# Altium PCB MachESP8266.PcbDoc
Units mm, origin at the board's own origin, x right, y up, seen from the top; angles counter-clockwise.
Board outline 120.15 x 80.17 mm, 2 copper layers (Top Layer, Bottom Layer); 23 components, 19 nets, 86 pads, 0 vias.
Unrouted connection lines stored in the file: 1.
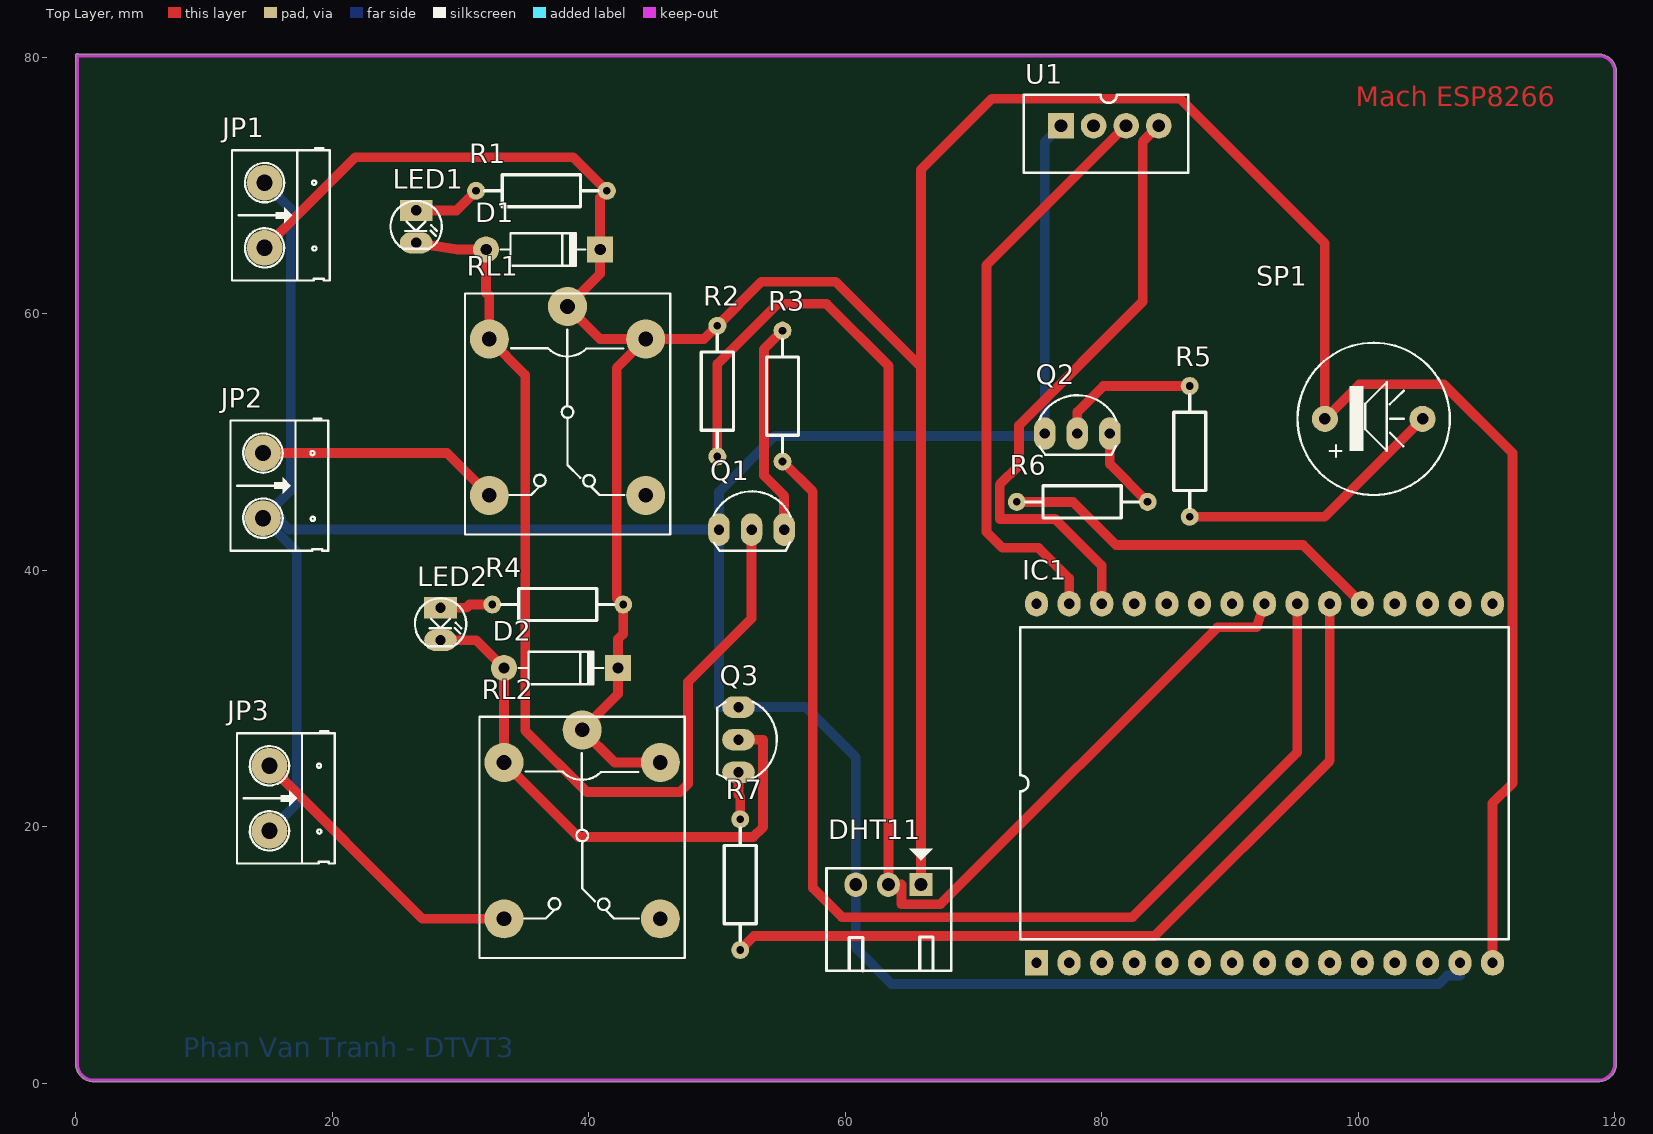
[diagram p0: Top Layer view]
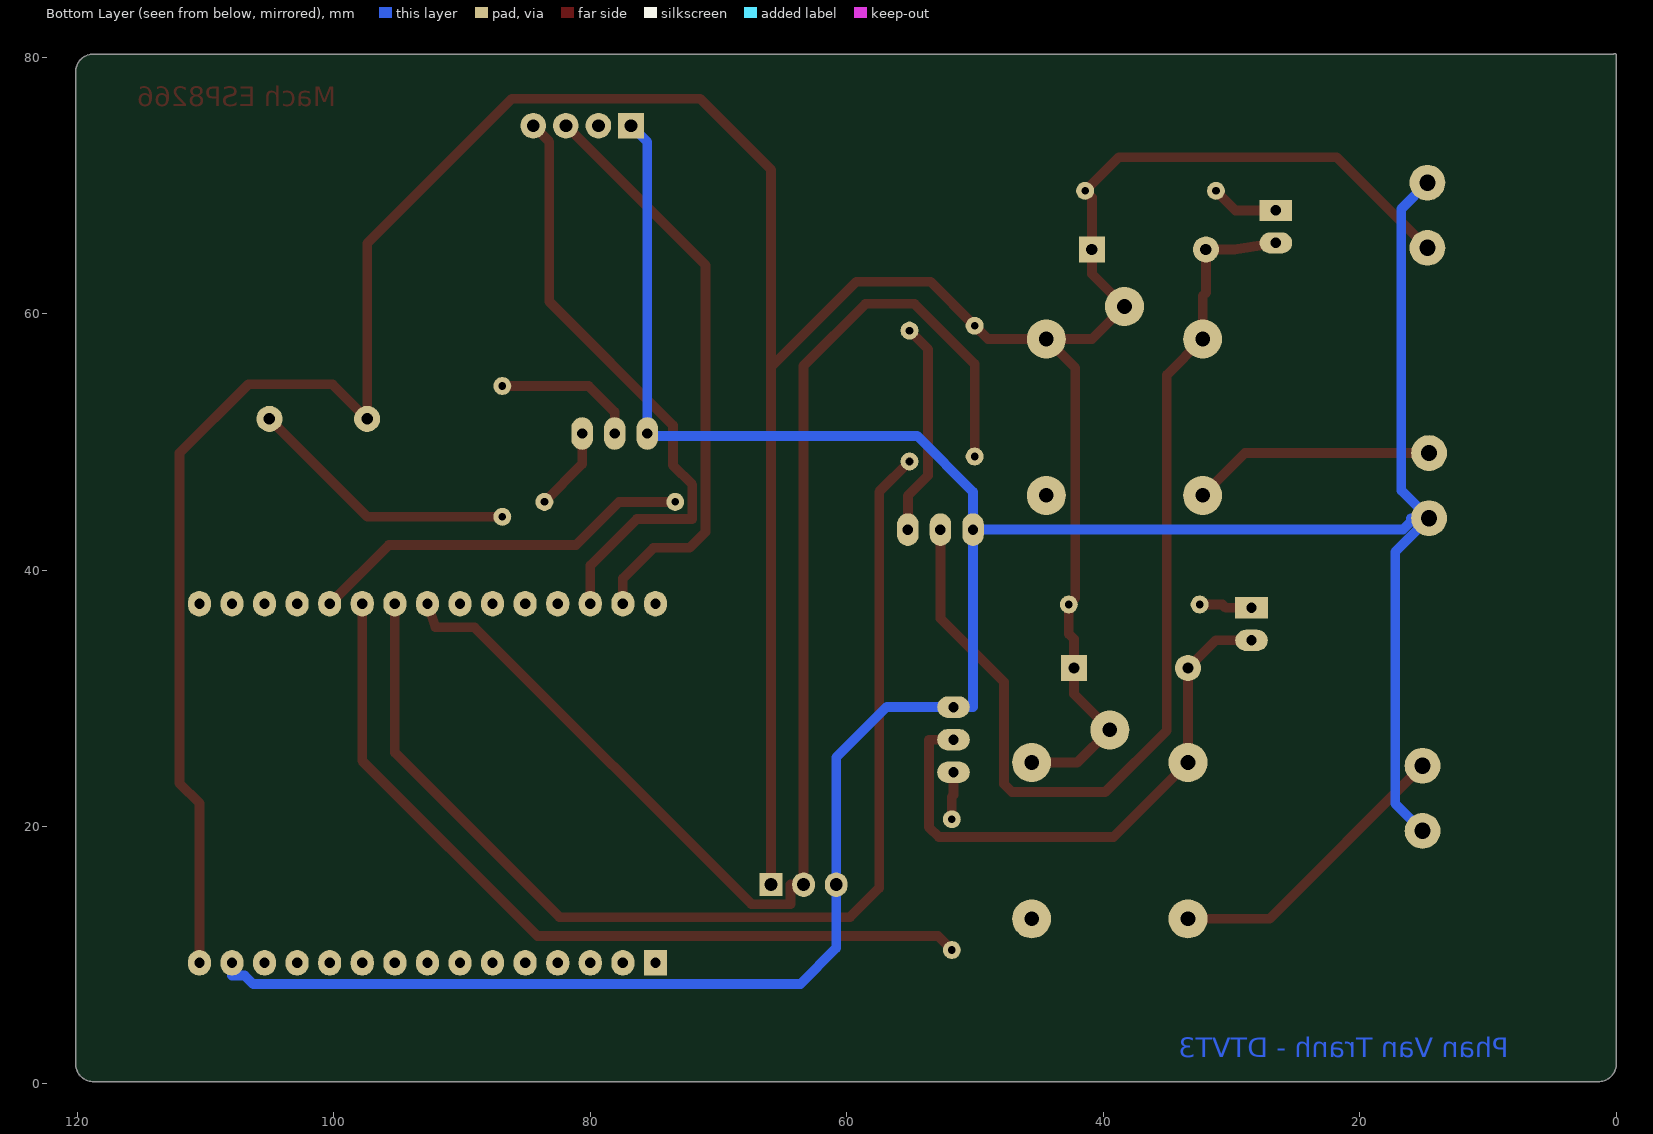
[diagram p1: Bottom Layer view, seen from below]
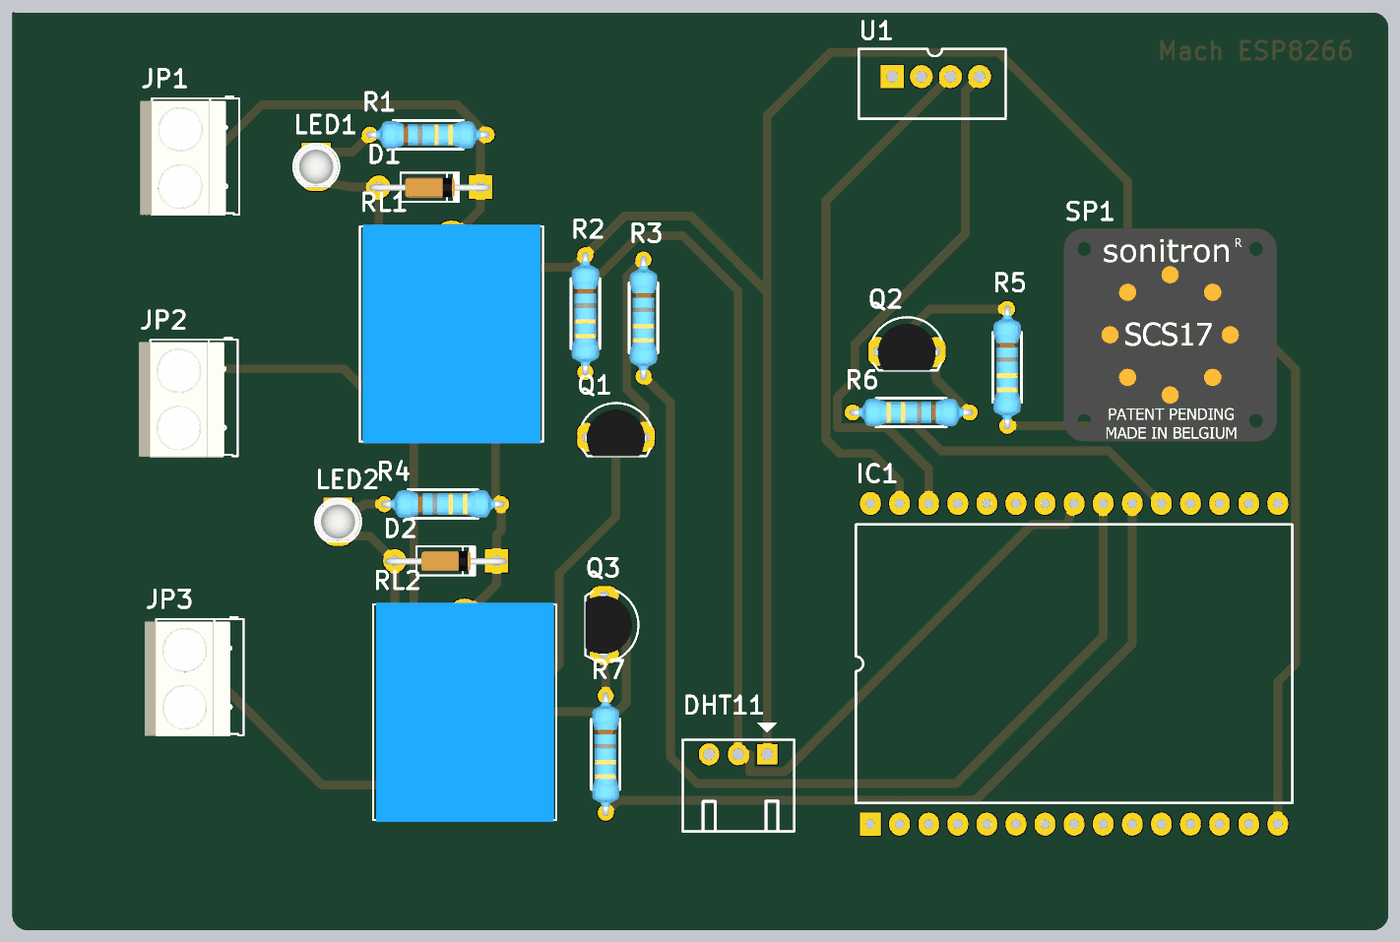
[diagram p2: 3D render of the assembled board from above, using the file's embedded part models]

## Layer stack, top to bottom
Top Solder: solder mask 0.0102, Solder Resist, Dk 3.5
Top Layer: signal copper 0.0356
Dielectric 1: dielectric 0.32, FR-4, Dk 4.8
Bottom Layer: signal copper 0.0356
Bottom Solder: solder mask 0.0102, Solder Resist, Dk 3.5

## Board outline
0,1.524 0,80.137 cw(c0.123,80.168) 0.206,80.264 118.745,80.264 cw(c118.745,78.867) 120.142,78.867 120.142,1.524 cw(c118.745,1.524) 118.745,0.127 1.397,0.127 cw(c1.397,1.524)

## Design rules (kind name [scope] priority, off if disabled: settings)
Clearance [All] p1: gap=0.254 ignorepadtopadclearanceinfootprint=FALSE
PolygonConnect [All] p1: connectstyle=Relief reliefconductorwidth=0.254 reliefentries=4 polygonreliefangle="90 Angle" airgapwidth=0.254
RoutingLayers RoutingLayers_GND [InNet('GND')] p1: top layer_v5=FALSE bottom layer_v5=TRUE
RoutingLayers [All] p2: top layer_v5=TRUE bottom layer_v5=FALSE
RoutingVias [All] p1: holewidth=0.711 width=1.27 viastyle="Through Hole" minholewidth=0.711 minwidth=1.27 maxholewidth=0.711 maxwidth=1.27
SolderMaskExpansion [All] p1: expansion=0.102 istentingtop=FALSE
SupplyNets "Schematic Supply Nets_2" [InNet('VCC')] p1: voltage=0.000
SupplyNets "Schematic Supply Nets" [InNet('GND')] p2: voltage=0.000
Width Width_GND [InNet('GND')] p1: maxlimit=0.762 minlimit=0.762 preferedwidth=0.762
Width [All] p2: maxlimit=0.762 minlimit=0.762 preferedwidth=0.762
29 further rules are at their usual default settings.

## Components (designator, comment, footprint, x,y, rotation, side; value= is the part's Value field where it differs from the comment)
D1 "1N4007" D1A 32.004,65.024 r180 top
D2 "1N4007" D1A 33.401,32.385 r180 top
DHT11 "JP3" "Header 3P DC 2.54" 65.913,15.494 r270 top
IC1 "ESP8266" "ESP8266 - duplicate" 74.93,9.398 r90 top
JP1 "Header 2_1" HED2 14.732,70.231 r270 top value="Header 2"
JP2 "Header 2_1" HED2 14.605,49.149 r270 top value="Header 2"
JP3 "Header 2_1" HED2 15.113,24.765 r270 top value="Header 2"
LED1 "LED" LED-3 26.543,68.072 r270 top value="LED 3 ly Single Colour"
LED2 "LED" LED-3 28.448,37.084 r270 top value="LED 3 ly Single Colour"
Q1 "C1815" TO92 52.705,43.18 r0 top value=C9014
Q2 "C1815" TO92 78.105,50.673 r0 top value=C9014
Q3 "C1815" TO92 51.689,26.797 r270 top value=C9014
R1 "1k" "tro vach 1/4w" 36.322,69.596 r180 top
R2 "1k" "tro vach 1/4w" 50.038,53.975 r90 top
R3 "1k" "tro vach 1/4w" 55.118,53.594 r90 top
R4 "1k" "tro vach 1/4w" 37.592,37.338 r180 top
R5 "1k" "tro vach 1/4w" 86.868,49.276 r90 top
R6 "1k" "tro vach 1/4w" 78.486,45.339 r0 top
R7 "1k" "tro vach 1/4w" 51.816,15.494 r90 top
RL1 "Relay 10A/12V" RL_SPDT_10A 38.354,60.579 r270 top value="Relay SPDT, 10A, 12V"
RL2 "Relay 10A/12V" RL_SPDT_10A 39.497,27.559 r270 top value="Relay SPDT, 10A, 12V"
SP1 "Speaker" SPK 97.409,51.816 r0 top value="Speaker Chip"
U1 "OLED" OLED1306 66.548,75.819 r0 top

## Footprints (in the part's own frame and the unit in brackets; to place one, negate y for a bottom-side part, rotate by r counter-clockwise, add the part's x,y. Pads: shape width x height; smd on the part's side, far side on the other; paste and mask are expansions set on the pad)
D1A [mil] "Diode 1A, W 100mil, L 350mil"
  round 80 hole 35: 1(0,0)
  rect 80x80 hole 35: 2(-350,0)
  silkscreen extent -305,-50 -45,50, body extent -386,-33 34,36, height 84
"ESP8266 - duplicate" [mm]
  rect 2x1.8 hole 0.8: 1(0,0)
  oval 2x1.8 hole 0.8: 2(0,-2.54) 3(0,-5.08) 4(0,-7.62) 5(0,-10.16) 6(0,-12.7) 7(0,-15.24) 8(0,-17.78) 9(0,-20.32) 10(0,-22.86) 11(0,-25.4) 12(0,-27.94) 13(0,-30.48) 14(0,-33.02) 15(0,-35.56) 16(28,-35.56) 17(28,-33.02) 18(28,-30.48) 19(28,-27.94) 20(28,-25.4) 21(28,-22.86) 22(28,-20.32) 23(28,-17.78) 24(28,-15.24) 25(28,-12.7) 26(28,-10.16) 27(28,-7.62) 28(28,-5.08) 29(28,-2.54) 30(28,0)
  silkscreen extent 1.83,-36.83 26.16,1.27
"Header 3P DC 2.54" [mil]
  rect 70x70 hole 39.37 unplated: 1(0,0)
  oval 75x70 hole 39.37 unplated: 2(0,-100) 3(0,-200)
  silkscreen extent -110,-290 265,93
HED2 [mil] "Header 2, 2 pin, hight 300mil, Pin to Pin 200, Colour Green"
  round 110 hole 50: 1(0,0) 2(200,0)
  silkscreen extent -106,-100 300,200, body extent -92,-140 302,155, height 394
LED-3 [mil] "LED 2 PIN, 3ly Only colour"
  rect 65x100 hole 32: 1(0,0)
  oval 65x100 hole 32: 2(100,0)
  silkscreen extent -29,-78 118,79, body extent -25,-75 113,75, height 217
OLED1306 [mm]
  rect 2x2 hole 1: 1(10.287,-1.143)
  round 2 hole 1: 2(12.827,-1.143) 3(15.367,-1.143) 4(17.907,-1.143)
  silkscreen extent 7.37,-4.83 20.19,1.27
RL_SPDT_10A [mil] "Relay SPDT, 5 pin, 10A,W 650mil, L 800mil, H 800mil"
  round 120 hole 45: 1(0,0) 2(580,240) 3(580,-240) 4(100,-240) 5(100,240)
  silkscreen extent -40,-315 700,315, body extent -46,-304 706,306, height 602
SPK [mil] "Speaker Chip"
  round 80 hole 35: 1(0,0) 2(300,0)
  silkscreen extent -84,-234 384,234, body extent -221,-354 511,378, height 344
TO92 [mil] "TO-92"
  oval 66x100 hole 32: 1(-100,0) 2(0,0) 3(100,0)
  silkscreen extent -117,-65 120,118, body extent -109,-66 109,95, height 245
"tro vach 1/4w" [mm]
  round 1.4 hole 0.6: 1(-5.1,0) 2(5.1,0)
  silkscreen extent -4.39,-1.25 4.42,1.25, body extent -5.38,-1.2 5.38,1.2, height 2.41

## Part data
D1 D2: library part D1A, "Diode 1A"
DHT11: library part "Header 3P 2.54 Duc Cong", "Cắm", Chung_Loai=Cắm, Don_Vi=Con, Ma_Hang=MH001302, Ten_Linh_Kien="Header 3P XH2.54-3P Đực Cong"
JP1 JP2 JP3: "Header, 2-Pin", Manufacturer="Generic Components", Class=Connector
LED1 LED2: "LED Single colour Green and Red"
Q1 Q2 Q3: library part "Trans C1815 DIP", "NPN transistor"
R1 R2 R3 R4 R5 R6 R7: library part "Tro Vach 1/4W 5% 1k", "Cắm", Chung_Loai=Cắm, Don_Vi=Con, Ma_Hang=MH007390, So_Chan=2, Ten_Linh_Kien="Trở Vạch 1/4w 5% 1k"
RL1 RL2: library part "Relay 1", "Relay SPDT,10A - 12VDC 5 Pin"
SP1: library part SPK, "Speaker Chip"
U1: library part OLED1306

## Nets (pads, with @x,y where several pads share a name; then routed paths per layer and width w, separated by ;. In a path a pad name is that pad's centre, name@x,y a point inside that pad or via, vN(x,y) a via of type N, cw(c..) or ccw(c..) an arc to the next point about the centre after c; other vN are vias at no path point)
Buzzer: IC1.20 R6.1 | length 30.2
  Top Layer w0.762: R6.1 77.775,45.339 81.128,41.986 95.716,41.986 100.305,37.398 IC1.20
GND: DHT11.3 IC1.14 JP1.1 JP2.2 JP3.2 Q1.1 Q2.1 Q3.1 U1.1 | length 235.8
  Bottom Layer w0.762: JP1.1 16.764,68.199 16.764,46.228 JP2.2 ; JP3.2 17.247,21.819 17.247,41.427 JP2.2 ; U1.1 75.565,73.406 Q2.1 75.565,50.47 54.508,50.47 50.165,46.126 Q1.1 ; IC1.14 107.95,8.407 106.959,8.407 106.299,7.747 63.627,7.747 60.833,10.541 DHT11.3 60.833,25.4 56.896,29.337 Q3.1 50.165,29.337 Q1.1 ; JP2.2 16.002,44.069 16.002,43.815 16.637,43.18 Q1.1
NetD1_1: D1.1 LED1.2 Q1.2 RL1.4 | length 81.1
  Top Layer w0.762: LED1.2 29.769,65.024 D1.1 32.004,61.646 32.258,61.392 RL1.4 35.052,55.245 35.052,27.508 39.853,22.708 47.117,22.708 47.752,23.343 47.752,31.293 52.705,36.246 Q1.2
NetD2_1: D2.1 LED2.2 Q3.2 RL2.4 | length 44.9
  Top Layer w0.762: LED2.2 31.242,34.544 D2.1 RL2.4 39.218,19.202 52.832,19.202 53.594,19.964 53.594,26.797 Q3.2
NetJP2_1: JP2.1 RL1.3 | length 19
  Top Layer w0.762: JP2.1 28.956,49.149 RL1.3
NetJP3_1: JP3.1 RL2.3 | length 23.2
  Top Layer w0.762: JP3.1 27.051,12.827 RL2.3
NetLED1_1: LED1.1 R1.2 | length 5.3
  Top Layer w0.762: LED1.1 29.698,68.072 R1.2
NetLED2_1: LED2.1 R4.2 | length 4.1
  Top Layer w0.762: LED2.1 30.455,37.084 30.709,37.338 R4.2
NetQ1_3: Q1.3 R3.2 | length 16.8
  Top Layer w0.762: R3.2 53.67,57.246 53.67,47.396 55.245,45.822 Q1.3
NetQ2_2: Q2.2 R5.2 | length 11.3
  Top Layer w0.762: Q2.2 78.105,52.344 80.137,54.376 R5.2
NetQ2_3: Q2.3 R6.2 | length 6.6
  Top Layer w0.762: Q2.3 80.645,48.28 R6.2
NetQ3_3: Q3.3 R7.2 | length 3.7
  Top Layer w0.762: Q3.3 51.689,22.479 51.816,22.352 R7.2
NetR5_1: R5.1 SP1.2 | length 21.3
  Top Layer w0.762: R5.1 97.389,44.176 SP1.2
Relay1: IC1.22 R3.1 | length 89.9
  Top Layer w0.762: R3.1 57.48,46.132 57.48,15.24 59.766,12.954 82.423,12.954 95.25,25.781 IC1.22
Relay2: IC1.21 R7.1 | length 64.3
  Top Layer w0.762: R7.1 52.903,11.481 84.125,11.481 97.79,25.146 IC1.21
SCL: IC1.29 U1.3 | length 46.1
  Top Layer w0.762: IC1.29 77.47,39.37 75.082,41.758 72.265,41.758 71.035,42.988 71.035,63.796 U1.3
SDA: IC1.28 U1.4 | length 48.2
  Top Layer w0.762: IC1.28 80.01,40.372 76.378,44.004 72.051,44.004 72.051,46.685 73.558,48.193 73.558,51.308 83.21,60.96 83.21,73.431 U1.4
Sensor: DHT11.2 IC1.23 R2.1 | length 106.1
  Top Layer w0.762: R2.1 50.038,56.083 54.737,60.782 58.547,60.782 63.373,55.956 DHT11.2 64.389,15.494 64.389,13.97 67.437,13.97 89.027,35.56 92.075,35.56 IC1.23
VCC: D1.2 D2.2 DHT11.1 IC1.15 JP1.2 R1.1 R2.2 R4.1 RL1.1 RL1.5 RL2.1 RL2.5 SP1.1 U1.2 | length 280.5
  Top Layer w0.762: JP1.2 21.793,72.212 38.806,72.212 R1.1 40.894,69.068 D1.2 40.894,63.119 RL1.1 40.894,58.039 RL1.5 ; RL2.5 42.037,25.019 RL2.1 42.291,30.353 D2.2 42.291,34.646 42.692,35.047 R4.1 42.189,37.841 42.189,55.778 RL1.5 ; DHT11.1 65.913,55.855 ; IC1.15 110.49,21.844 112.039,23.393 112.039,49.149 106.68,54.508 100.101,54.508 SP1.1 97.409,65.481 86.106,76.784 71.45,76.784 65.913,71.247 65.913,55.855 ; RL1.5 49.002,58.039 R2.2 53.472,62.509 59.258,62.509 65.913,55.855
pads on no net: IC1.1 IC1.2 IC1.3 IC1.4 IC1.5 IC1.6 IC1.7 IC1.8 IC1.9 IC1.10 IC1.11 IC1.12 IC1.13 IC1.16 IC1.17 IC1.18 IC1.19 IC1.24 IC1.25 IC1.26 IC1.27 IC1.30 RL1.2 RL2.2

## Keep-outs
Top Layer:
  lines w0.254: 0.123,80.168 cw(c0,80.137) 0.127,80.137 ; 0.127,80.137 0.127,1.524 ccw(c1.397,1.524) 1.397,0.254 118.745,0.254 ccw(c118.745,1.524) 120.015,1.524 120.015,78.867 ccw(c118.745,78.867) 118.745,80.137 0.127,80.137

## Other copper
Top Layer:
  text "Mach ESP8266" at 99.822,76.2 h1.52
Bottom Layer:
  text "Phan Van Tranh - DTVT3" at 8.382,2.032 h1.52